# Altium PCB BLE_PCB_Rev1.PcbDoc (part 1 of 2)
Units mm, origin at the board's own origin, x right, y up, seen from the top; angles counter-clockwise.
Board outline 81.41 x 40.9 mm, 2 copper layers (Top Layer, Bottom Layer), stack 1.57 mm thick; 31 components, 55 nets, 156 pads, 14 vias.
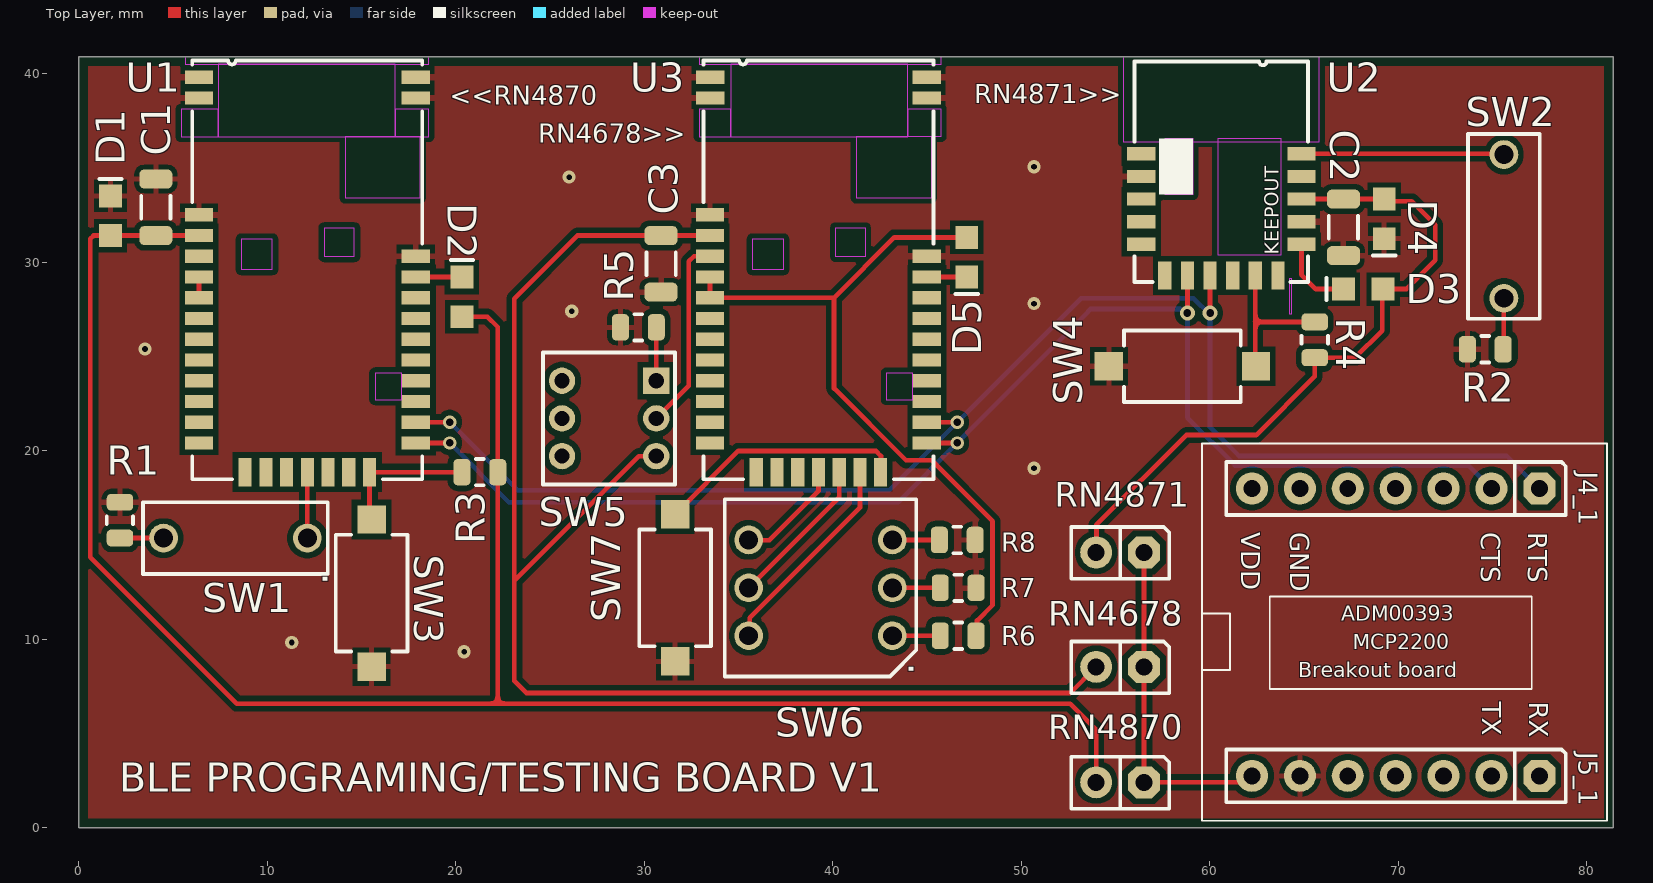
[diagram p0: Top Layer view]
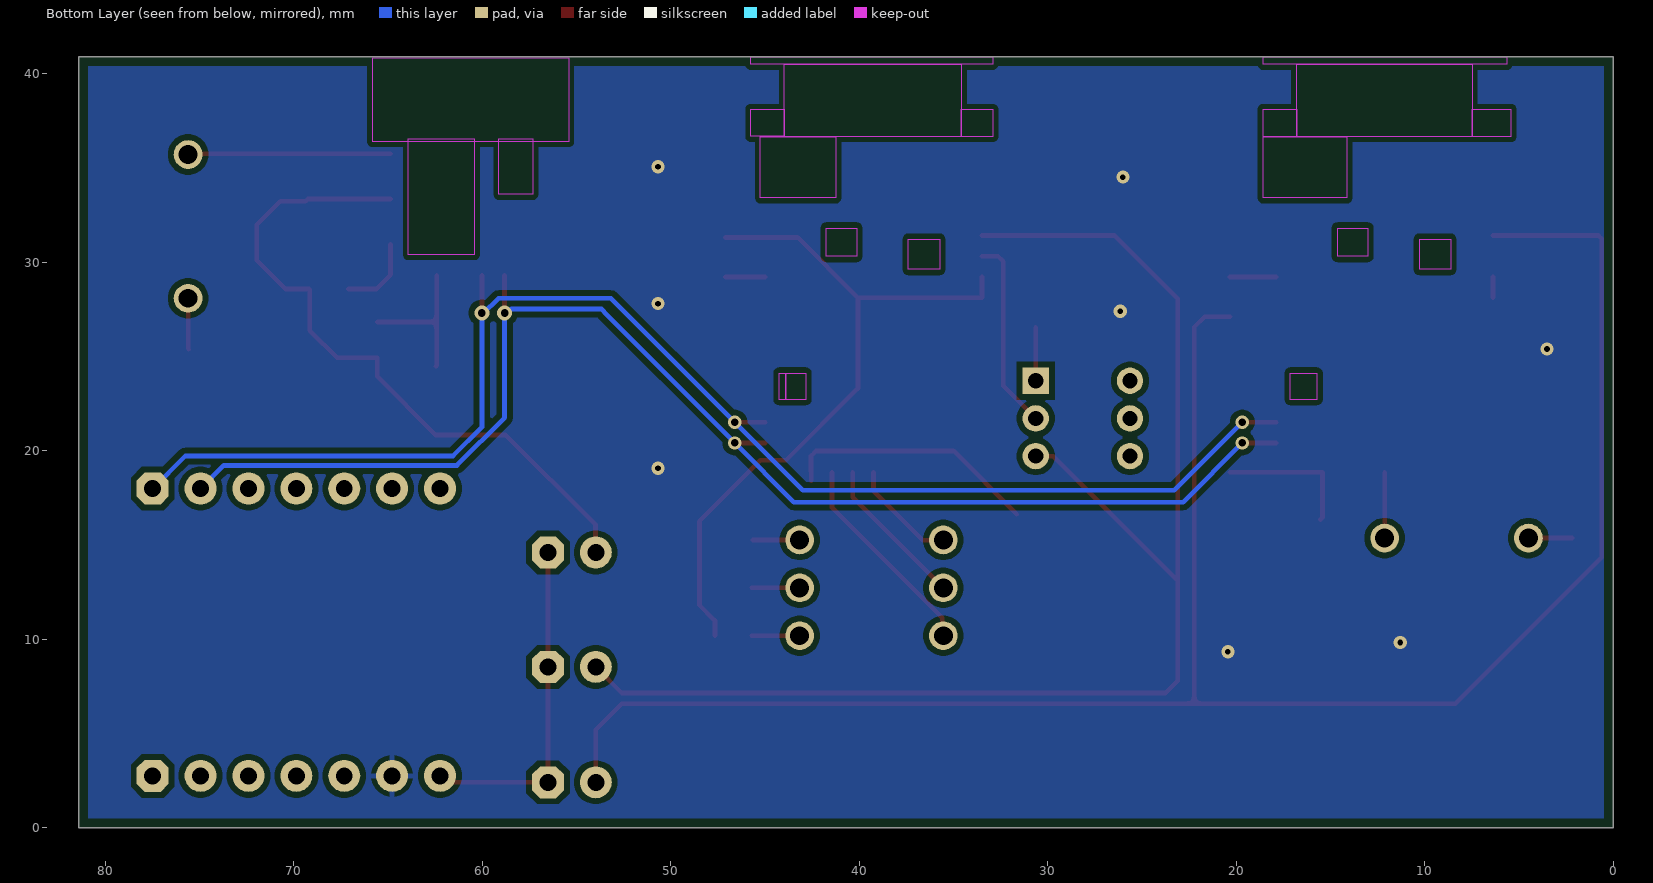
[diagram p1: Bottom Layer view, seen from below]

## Layer stack, top to bottom
Top Solder: solder mask 0.01, Solder Resist, Dk 3.5
Top Layer: signal copper 0.035
Dielectric1: core 1.5, FR-4, Dk 4.8
Bottom Layer: signal copper 0.035
Bottom Solder: solder mask 0.01, Solder Resist, Dk 3.5

## Board outline
0,0 0,40.904 81.407,40.904 81.407,0

## Design rules (kind name [scope] priority, off if disabled: settings)
AcuteAngle [All] p1: minimum=9.00000000000000E+0001 checktracksonly=TRUE
BoardOutlineClearance BoardOutlineClearance_Overlay [OnLayer('Top Overlay','Bottom Overlay')] p1: gap=0.2 ignorepadtopadclearanceinfootprint=FALSE
BoardOutlineClearance [All] p2: gap=0.5 ignorepadtopadclearanceinfootprint=FALSE
Clearance "Net to Polygon 0.5mm" [InNet('your net here') vs (IsRegion)] p1: gap=0.5 ignorepadtopadclearanceinfootprint=FALSE
Clearance "Poly 0.3mm" [(IsRegion)] p2: gap=0.3 ignorepadtopadclearanceinfootprint=FALSE
Clearance [All] p3: gap=0.25 ignorepadtopadclearanceinfootprint=TRUE
ComponentClearance ComponentClearance_ignore [HasFootprint('NET_TIE_0.5mm')] p1: gap=0 collisioncheckmode=3 verticalgap=0 showdistances=FALSE
ComponentClearance [All] p2: gap=0.2 collisioncheckmode=3 verticalgap=0.2 showdistances=FALSE
DiffPairsRouting [All] p1: maxlimit=0.25 minlimit=0.25 mostfreqgap=0.25 toplayer_minwidth=0.25 toplayer_maxwidth=0.25 toplayer_prefwidth=0.25 bottomlayer_minwidth=0.25 bottomlayer_maxwidth=0.25 bottomlayer_prefwidth=0.25 maxuncoupledlength=12.7
FabricationTestPointUsage TestPointUsage [All] p1: valid=0 allowmultiple=FALSE
FabricationTestpoint Testpoint [All] p1: side=3 testpointundercomponent=TRUE minsize=1.016 maxsize=2.54 preferedsize=1.524 minholesize=0 maxholesize=1.016 preferedholesize=0.813 testpointgrid=0.025 allowsidetop=TRUE allowsidebottom=TRUE usegrid=TRUE gridtolerance=0
HoleSize [All] p1: absolutevalues=TRUE maxlimit=6 minlimit=0.25 maxpercent=80.000 minpercent=20.000
HoleToHoleClearance [All] p1: gap=0.3 allowstackedmicrovias=FALSE
MinimumAnnularRing [All] p1: minimumring=0.15
MinimumSolderMaskSliver [All] p1: minsoldermaskwidth=0.15
PasteMaskExpansion PasteMaskExpansion_DNP [IsPad AND HasCompParameterValue('Populated','DNP')] p1: expansion=-5
PasteMaskExpansion [All] p2: expansion=0
PlaneClearance PlaneClearance_pads [IsPad] p1: clearance=0.3
PlaneClearance PlaneClearance_drill [IsObjectKind('Hole')] p2: clearance=0.4
PlaneConnect PlaneConnect_full [IsVia] p1: planeconnectstyle=Direct reliefexpansion=0.5 reliefentries=4 reliefconductorwidth=0.3 reliefairgap=0.3
PlaneConnect [All] p2: planeconnectstyle=Relief reliefexpansion=0.3 reliefentries=4 reliefconductorwidth=0.25 reliefairgap=0.25
PolygonConnect PolygonConnect_0.7 [IsNamedPolygon('0.7mm') vs (InPadClass('All Pads'))] p1: connectstyle=Relief reliefconductorwidth=0.7 reliefentries=4 polygonreliefangle="90 Angle" airgapwidth=0.25
PolygonConnect PolygonConnect_0.5 [IsNamedPolygon('0.5mm') vs (InPadClass('All Pads'))] p2: connectstyle=Relief reliefconductorwidth=0.5 reliefentries=4 polygonreliefangle="90 Angle" airgapwidth=0.25
PolygonConnect PolygonConnect_full [All vs IsVia or IsNamedPolygon('full')] p3: connectstyle=Direct reliefconductorwidth=0 reliefentries=4 polygonreliefangle="90 Angle" airgapwidth=0.254
PolygonConnect [All] p4: connectstyle=Relief reliefconductorwidth=0.3 reliefentries=4 polygonreliefangle="90 Angle" airgapwidth=0.25
RoomDefinition Sheet1 [InComponentClass('Sheet1')] p1: confinementstyle=ConfineIn formatcopy=TRUE lockcomponents=FALSE outline -327.18,-488.376 -276.38,-488.376 -276.38,-462.976 -327.18,-462.976
RoutingCorners [All] p1: cornerstyle=45-Degree minsetback=2.5 maxsetback=2.5
RoutingVias [All] p1: holewidth=0.4 width=0.8 viastyle="Through Hole" minholewidth=0.3 minwidth=0.7 maxholewidth=1.6 maxwidth=2.5
SMDToCorner [All] p1: distance=39370
ShortCircuit [IsNet] p1: allowed=FALSE
SilkToSilkClearance [All] p1: silktosilkclearance=0.15
SilkToSolderMaskClearance SilkscreenOverComponentPads [IsPad] p1: minsilkscreentomaskgap=0.2 clearancetoexposedcopper=TRUE
SolderMaskExpansion SolderMaskExpansion_Component_Via [IsComponentVia] p1: expansion=0.075 istentingtop=FALSE soldermaskfromhole=TRUE
SolderMaskExpansion [All] p2: expansion=0.1 istentingtop=FALSE
UnRoutedNet [All] p1: checkbadconnections=TRUE
ViasUnderSMD [All] p1: allowed=FALSE
Width [All] p1: maxlimit=7 minlimit=0.2 preferedwidth=0.25
15 further rules are at their usual default settings.

## Components (designator, comment, footprint, x,y, rotation, side; value= is the part's Value field where it differs from the comment)
C1 "Capacitor NP" CAP_C_1206 4.097,32.912 r90 top value=10uF
C2 "Capacitor NP" CAP_C_1206 67.089,31.848 r270 top value=10uF
C3 "Capacitor NP" CAP_C_1206 30.894,29.912 r90 top value=10uF
D1 "LED_blue" LED_0805_BLUE 1.692,32.462 r90 top value=BLUE
D2 "LED_blue" LED_0805_BLUE 20.333,28.162 r90 top value=BLUE
D3 "LED_blue" LED_0805_BLUE 68.139,28.575 r180 top value=BLUE
D4 "LED_blue" LED_0805_BLUE 69.248,32.298 r270 top value=BLUE
D5 "LED_blue" LED_0805_BLUE 47.103,30.262 r270 top value=BLUE
J4_1 "Header 1x7" HDR_M_2.54_1x7 69.857,17.995 r180 top locked value="HDR-2.54 Male 1x7"
J5_1 "Header 1x7" HDR_M_2.54_1x7 69.857,2.755 r180 top locked value="HDR-2.54 Male 1x7"
R1 "Resistor" RES_C_0805 2.192,16.317 r270 top value=4.7k
R2 "Resistor" RES_C_0805 74.611,25.382 r0 top value=4.7k
R3 "Resistor" RES_C_0805 21.283,18.862 r0 top value=4.7k
R4 "Resistor" RES_C_0805 65.565,25.882 r90 top value=4.7k
R5 "Resistor" RES_C_0805 29.69,26.543 r0 top value=20k
R6 "Resistor" RES_C_0805 46.653,10.187 r0 top value=10
R7 "Resistor" RES_C_0805 46.653,12.727 r0 top value=4.7k
R8 "Resistor" RES_C_0805 46.603,15.267 r0 top value=4.7k
RN4678 "Header 1x2" HDR_M_2.54_1x2 55.245,8.536 r180 top value="HDR-2.54 Male 1x2" (schematic designator J4)
RN4870 "Header 1x2" HDR_M_2.54_1x2 55.245,2.413 r180 top value="HDR-2.54 Male 1x2" (schematic designator J3)
RN4871 "Header 1x2" HDR_M_2.54_1x2 55.245,14.605 r180 top value="HDR-2.54 Male 1x2" (schematic designator J5)
SW1 "Switch DIP 1 Pos" "SW_TH_2.54MM X 1 418117270901" 8.321,15.367 r90 top value="DIP 1 SPST"
SW2 "Switch DIP 1 Pos" "SW_TH_2.54MM X 1 418117270901" 75.598,31.898 r180 top value="DIP 1 SPST"
SW3 "Switch 2 Pin" "SW_TACT_SMD_CK_RS-282G05A3-SM RT" 15.543,12.446 r270 top value=RS-282G05A-SM_RT
SW4 "Switch 2 Pin" "SW_TACT_SMD_CK_RS-282G05A3-SM RT" 58.547,24.482 r180 top value=RS-282G05A-SM_RT
SW5 "Switch on-off 6 Pin" SW_TACT_TH_PS07-22L-PF 28.14,21.712 r270 top value="TACT DPST"
SW6 "Switch DIP 3 Pos" "SW_TH_2.54MM X 3 Omron" 39.351,12.727 r90 top value=DSS-03-B-PF
SW7 "Switch 2 Pin" "SW_TACT_SMD_CK_RS-282G05A3-SM RT" 31.64,12.727 r270 top value=RS-282G05A-SM_RT
U1 "MODULE BM70BLES1FC2" MOD_BM70BLES1FC2 12.133,29.612 r0 top value=RN4870
U2 "RN4871 MODULE" "RN4871 MODULE-16" 60.612,34.798 r0 top value=RN4871
U3 "MODULE BM78SPPS5xC2" MOD_BM78SPPS5xC2 39.241,29.612 r0 top value=RN4678

## Footprints (in the part's own frame and the unit in brackets; to place one, negate y for a bottom-side part, rotate by r counter-clockwise, add the part's x,y. Pads: shape width x height; smd on the part's side, far side on the other; paste and mask are expansions set on the pad)
CAP_C_1206 [mm] "Chip Capacitor, 2-Leads, Body 3.2x1.6mm, IPC Medium Density"
  rrect50% 1x1.75 smd: 1(-1.5,0) 2(1.5,0)
  silkscreen extent -0.6,-0.77 0.6,0.77, body extent -1.6,-0.8 1.6,0.8, height 1
HDR_M_2.54_1x2 [mm] "Header Male Vertical 4 Way 2.54mm Pitch"
  oct 1.7x1.7 hole 0.9: 1(-1.27,0)
  round 1.7 hole 0.9: 2(1.27,0)
  silkscreen extent -2.6,-1.35 2.6,1.4, body extent -2.54,-1.27 2.54,1.27, height 5.94
HDR_M_2.54_1x7 [mm] "Header Male Vertical 7 Way 2.54mm Pitch"
  oct 1.7x1.7 hole 0.9: 1(-7.62,0)
  round 1.7 hole 0.9: 2(-5.08,0) 3(-2.54,0) 4(0,0) 5(2.54,0) 6(5.08,0) 7(7.62,0)
  silkscreen extent -9.02,-1.4 8.98,1.4, body extent -8.88,-1.27 8.89,1.28, height 5.94
LED_0805_BLUE [mm]
  rect 1.2x1.2 smd: 1(-1.05,0) 2(1.05,0)
  silkscreen extent 1.95,-0.6 1.95,0.6, body extent -1.01,-0.62 1.01,0.63, height 1.1
MOD_BM70BLES1FC2 [mm]
  rect 1.5x0.7 smd: 1(-5.742,10.2) 2(-5.742,9.1) 3(-5.75,2.9) 4(-5.75,1.8) 5(-5.75,0.7) 6(-5.75,-0.4) 7(-5.75,-1.5) 8(-5.75,-2.6) 9(-5.75,-3.7) 10(-5.75,-4.8) 11(-5.75,-5.9) 12(-5.75,-7) 13(-5.75,-8.1) 14(-5.75,-9.2) 22(5.75,-9.2) 23(5.75,-8.1) 24(5.75,-7) 25(5.75,-5.9) 26(5.75,-4.8) 27(5.75,-3.7) 28(5.75,-2.6) 29(5.75,-1.5) 30(5.75,-0.4) 31(5.75,0.7) 32(5.75,9.1) 33(5.75,10.2)
  rect 0.7x1.5 smd: 15(-3.3,-10.75) 16(-2.2,-10.75) 17(-1.1,-10.75) 18(0,-10.75) 19(1.1,-10.75) 20(2.2,-10.75) 21(3.3,-10.75)
  Top Layer keep-out region: 2,3.8 6,3.8 6,7.05 2,7.05
  Top Layer keep-out region: 3.6,-6.9 5,-6.9 5,-5.5 3.6,-5.5
  Top Layer keep-out region: 0.9,0.7 2.5,0.7 2.5,2.2 0.9,2.2
  Top Layer keep-out region: -3.5,0 -1.85,0 -1.85,1.6 -3.5,1.6
  silkscreen extent -6.1,-11.12 6.1,11.08, body extent -6,-11 6,11, height 2.4
MOD_BM78SPPS5xC2 [mm]
  rect 1.5x0.7 smd: 1(-5.742,10.2) 2(-5.742,9.1) 3(-5.75,2.9) 4(-5.75,1.8) 5(-5.75,0.7) 6(-5.75,-0.4) 7(-5.75,-1.5) 8(-5.75,-2.6) 9(-5.75,-3.7) 10(-5.75,-4.8) 11(-5.75,-5.9) 12(-5.75,-7) 13(-5.75,-8.1) 14(-5.75,-9.2) 22(5.75,-9.2) 23(5.75,-8.1) 24(5.75,-7) 25(5.75,-5.9) 26(5.75,-4.8) 27(5.75,-3.7) 28(5.75,-2.6) 29(5.75,-1.5) 30(5.75,-0.4) 31(5.75,0.7) 32(5.75,9.1) 33(5.75,10.2)
  rect 0.7x1.5 smd: 15(-3.3,-10.75) 16(-2.2,-10.75) 17(-1.1,-10.75) 18(0,-10.75) 19(1.1,-10.75) 20(2.2,-10.75) 21(3.3,-10.75)
  Top Layer keep-out region: 2,3.8 6,3.8 6,7.05 2,7.05
  Top Layer keep-out region: 3.6,-6.9 5,-6.9 5,-5.5 3.6,-5.5
  Top Layer keep-out region: 0.9,0.7 2.5,0.7 2.5,2.2 0.9,2.2
  Top Layer keep-out region: -3.5,0 -1.85,0 -1.85,1.6 -3.5,1.6
  silkscreen extent -6.1,-11.12 6.1,11.08, body extent -6,-11 6,11, height 2.4
RES_C_0805 [mm] "Chip Resistor, 2-Leads, Body 2.0x1.3mm, IPC Medium Density"
  rrect50% 0.9x1.4 smd: 1(-0.95,0) 2(0.95,0)
  silkscreen extent -0.2,-0.7 0.2,0.7, body extent -1,-0.63 1,0.63, height 0.78
"RN4871 MODULE-16" [mm]
  rect 1.5x0.7 smd: 1(-4.25,0.95) 2(-4.25,-0.25) 3(-4.25,-1.45) 4(-4.25,-2.65) 5(-4.25,-3.85) 12(4.25,-3.85) 13(4.25,-2.65) 14(4.25,-1.45) 15(4.25,-0.25) 16(4.25,0.95)
  rect 0.7x1.5 smd: 6(-3,-5.5) 7(-1.8,-5.5) 8(-0.6,-5.5) 9(0.6,-5.5) 10(1.8,-5.5) 11(3,-5.5)
  silkscreen extent -4.6,-5.85 4.6,5.85, body extent -4.5,-5.79 4.5,5.75, height 2.4
"SW_TACT_SMD_CK_RS-282G05A3-SM RT" [mm]
  rect 1.5x1.5 smd: 1(-3.9,0) 2(3.9,0)
  silkscreen extent -3.1,-1.9 3.1,1.9, body extent -4,-1.8 4,1.8, height 2.5
SW_TACT_TH_PS07-22L-PF [mm] "Samtec 2mm Pitch Header 2x5 Pos"
  rect 1.4x1.4 hole 0.8: 1(-2,2.5)
  round 1.4 hole 0.8: 2(0,2.5) 3(2,2.5) 4(-2,-2.5) 5(0,-2.5) 6(2,-2.5)
  silkscreen extent -3.5,-3.5 3.5,3.5, body extent -3.2,-3.2 3.2,3.2
"SW_TH_2.54MM X 1 418117270901" [mil]
  round 60 hole 39.37: 1(0,-150.11) 2(0.01,150.12)
  silkscreen extent -75,-193 75,193, body extent -70,-189 70,189, height 248
"SW_TH_2.54MM X 3 Omron" [mil]
  round 60 hole 39.37: 1(-100,-150) 2(0,-150) 3(100,-150) 4(100,150) 5(0,150) 6(-100,150)
  silkscreen extent -185,-200 185,200, body extent -181,-195 181,195, height 280

## Part data
C1 C2 C3: library part CAP0461, Manufacturer 1=Murata, Manufacturer 2="Taiyo Yuden", Manufacturer Part Number 1=GRM31CR60J107ME39L, Manufacturer Part Number 2=JMK316BJ107ML-T, Operating Temperature="-55C to +85C", Package=1206, Supplier Part Number 1=490-4539-1-ND, Temperature Coefficient=X5R, Tolerance=20%, Voltage=6.3V, Category=Capacitor, ComponentLink1Description="SVN Datasheet", ComponentLink1URL=https://chn-vm-apps.microchip.com/mchprepo/parts/Datasheets/L0005E.pdf, ComponentLink2Description="Local Datasheet", ComponentLink2URL=C:\ALTIUM_WORK\00001_MCHP-CDB\Datasheets\L0005E.pdf, ComponentLink3Description="Open Symbol", ComponentLink3URL="C:\ALTIUM_WORK\00001_MCHP-CDB\Library\LibraryRefs\Capacitor NP.SchLib", ComponentLink4Description="Open Footprint", ComponentLink4URL=C:\ALTIUM_WORK\00001_MCHP-CDB\Library\Footprints\CAP_C_1206.PcbLib, ComponentLink5Description="Open Footprint 2", ComponentLink6Description="Open Footprint 3", ComponentLink7Description="Open Footprint 4", Description_="CAP CER 100uF 6.3V 20% X5R SMD 1206", Dev Tools Status=Production, MCHP-ID=CAP0461, Populated=Yes, Quantity Override=1, Revision=1, Status="MCL Design", Supplier 1=Digi-Key, Supplier 2=Digi-Key, Supplier Part Number 2=587-1963-1-ND, Symbol="Capacitor NP", Type=Ceramic
D1 D2 D3 D4 D5: library part DIODE1080, "LED", MCHP-ID=DIODE1080
J4_1: library part CON0448, Manufacturer 1="Wurth Electronics Inc", Manufacturer 2=Samtec, Manufacturer Part Number 1=61300711121, Manufacturer Part Number 2=TSW-107-07-S-S, Manufacturer Part Number 3=TSW-107-07-G-S, Supplier Part Number 1=732-5320-ND, Category=Connector, ComponentLink1Description="SVN Datasheet", ComponentLink1URL=https://chn-vm-apps.microchip.com/mchprepo/parts/Datasheets/TSW-XXX-XX-XXX-X-XX-XXX-MKT.pdf, ComponentLink2Description="Local Datasheet", ComponentLink2URL=C:\ALTIUM_WORK\00001_MCHP-CDB\Datasheets\TSW-XXX-XX-XXX-X-XX-XXX-MKT.pdf, ComponentLink3Description="Open Symbol", ComponentLink3URL="C:\ALTIUM_WORK\00001_MCHP-CDB\Library\LibraryRefs\Header 1x7.SchLib", ComponentLink4Description="Open Footprint", ComponentLink4URL=C:\ALTIUM_WORK\00001_MCHP-CDB\Library\Footprints\HDR_M_2.54_1x7.PcbLib, ComponentLink5Description="Open Footprint 2", ComponentLink6Description="Open Footprint 3", ComponentLink7Description="Open Footprint 4", Description_="CON HDR-2.54 Male 1x7 Gold 5.84MH TH VERT", Dev Tools Status=Production, Manufacturer 3=Samtec, MCHP-ID=CON0448, Populated=Yes, Quantity Override=1, Revision=1, Status="MCL Design", Supplier 1=Digi-Key, Supplier 2=Digi-Key, Supplier 3=Samtec, Supplier Part Number 2=SAM1033-07-ND, Supplier Part Number 3=TSW-107-07-G-S, Symbol="Header 1x7", Type="Header 2.54mm"
J5_1: library part CON0448, Manufacturer 1=Samtec, Manufacturer Part Number 1=TSW-107-07-S-S, Manufacturer Part Number 2=TSW-107-07-G-S, Category=Connector, ComponentLink1Description=Datasheet, ComponentLink1URL=https://chn-vm-apps.microchip.com/mchprepo/parts/Datasheets/TSW-XXX-XX-XXX-X-XX-XXX-MKT.pdf, Description_="CON HDR-2.54 Male 1x7 Gold 5.84MH TH VERT", Manufacturer 2=Samtec, MCHP-ID=CON0448, Populated=Yes, Quantity Override=1, Revision=1, Status=Production, Supplier 1=Samtec, Supplier 2=Samtec, Supplier Part Number 1=TSW-107-07-S-S, Supplier Part Number 2=TSW-107-07-G-S, Type="Header 2.54mm"
R1 R2 R3 R4 R5 R6 R7 R8: library part RES1372, Package=0805, Tolerance=0.1%, MCHP-ID=RES1372
RN4678 RN4870 RN4871: library part CON1312, Manufacturer 1="Sullins Connector Solutions", Manufacturer 2="SHENZHEN JUNHAO ENGINEERING", Manufacturer Part Number 1=PREC002SAAN-RC, Manufacturer Part Number 2=R-211-0211-0021-000, Supplier Part Number 1=S1012EC-02-ND, Category=Connector, ComponentLink1Description="SVN Datasheet", ComponentLink1URL="https://chn-vm-apps.microchip.com/mchprepo/parts/Datasheets/z RzCzzzSzzN-RC, ST,11635-B.pdf", ComponentLink2Description="Local Datasheet", ComponentLink2URL="C:\ALTIUM_WORK\00001_MCHP-CDB\Datasheets\z RzCzzzSzzN-RC, ST,11635-B.pdf", ComponentLink3Description="Open Symbol", ComponentLink3URL="C:\ALTIUM_WORK\00001_MCHP-CDB\Library\LibraryRefs\Header 1x2.SchLib", ComponentLink4Description="Open Footprint", ComponentLink4URL=C:\ALTIUM_WORK\00001_MCHP-CDB\Library\Footprints\HDR_M_2.54_1x2.PcbLib, ComponentLink5Description="Open Footprint 2", ComponentLink6Description="Open Footprint 3", ComponentLink7Description="Open Footprint 4", Description_="CON HDR-2.54 Male 1x2 Tin 5.84MH TH VERT", Dev Tools Status=Production, MCHP-ID=CON1312, Owner="Randolph Sobrepena", Populated=YES, Quantity Override=1, Restricted Sourcing=No, Revision=3, Status="MCL Design", Supplier 1=Digi-Key, Supplier 2="SHENZHEN JUNHAO ENGINEERING", Supplier Part Number 2=R-211-0211-0021-000, Symbol="Header 1x2", Type="Header 2.54mm"
SW1 SW2: library part SWITCH1055, Current=25mA, Manufacturer 1="Würth Elektronik", Manufacturer Part Number 1=418117270901, Operating Temperature="-40°C to 85°C", Supplier Part Number 1=732-3831-5-ND, Voltage=24V, Category=Switch, ComponentLink1Description="SVN Datasheet", ComponentLink1URL=https://chn-vm-apps.microchip.com/mchprepo/parts/Datasheets/4181172709xx.pdf, ComponentLink2Description="Local Datasheet", ComponentLink2URL=C:\ALTIUM_WORK\00001_MCHP-CDB\Datasheets\4181172709xx.pdf, ComponentLink3Description="Open Symbol", ComponentLink3URL="C:\ALTIUM_WORK\00001_MCHP-CDB\Library\LibraryRefs\Switch DIP 1 Pos.SchLib", ComponentLink4Description="Open Footprint", ComponentLink4URL="C:\ALTIUM_WORK\00001_MCHP-CDB\Library\Footprints\SW_TH_2.54MM X 1 418117270901.PcbLib", ComponentLink5Description="Open Footprint 2", ComponentLink6Description="Open Footprint 3", ComponentLink7Description="Open Footprint 4", Description_="SWITCH DIP 1 SPST 24V 25mA 418117270901 TH", Dev Tools Status=Production, MCHP-ID=SWITCH1055, Owner="Gabor Bihari", Populated=YES, Quantity Override=1, Revision=2, Status="MCL Design", Supplier 1=Digi-Key, Symbol="Switch DIP 1 Pos", Type=DIP
SW3 SW4 SW7: library part SWITCH1057, "Switch", Current=50mA, Manufacturer 1=C&K, Manufacturer 2="C&K Components", Manufacturer Part Number 1=KSR211GLFS, Manufacturer Part Number 2="RS-282G05A3-SM RT", Voltage=12V, Category=Switch, ComponentLink1Description="SVN Datasheet", ComponentLink1URL=https://chn-vm-apps.microchip.com/mchprepo/parts/Datasheets/RS-282G05A-SM_RT.pdf, ComponentLink2Description="Local Datasheet", ComponentLink2URL=C:\ALTIUM_WORK\00001_MCHP-CDB\Datasheets\RS-282G05A-SM_RT.pdf, ComponentLink3Description="Open Symbol", ComponentLink3URL="C:\ALTIUM_WORK\00001_MCHP-CDB\Library\LibraryRefs\Switch 2 Pin.SchLib", ComponentLink4Description="Open Footprint", ComponentLink4URL="C:\ALTIUM_WORK\00001_MCHP-CDB\Library\Footprints\SW_TACT_SMD_CK_RS-282G05A3-SM RT.PcbLib", ComponentLink5Description="Open Footprint 2", ComponentLink6Description="Open Footprint 3", ComponentLink7Description="Open Footprint 4", Description_="SWITCH TACT SPST 12V 50mA RS-282G05A3-SM RT", Dev Tools Status=Production, MCHP-ID=SWITCH1057, Owner="Gabor Bihari", Populated=YES, Quantity Override=1, Revision=2, Status="MCL Design", Supplier 1=C&K, Supplier 2=Digi-Key, Supplier Part Number 1=KSR211GLFS, Supplier Part Number 2=CKN10384CT-ND, Symbol="Switch 2 Pin", Type=Tactile
SW5: library part SWITCH1041, "PS-5177", Manufacturer 1=E-Switch, Manufacturer Part Number 1=TL2230OAF140, Category=Switch, ComponentLink1Description="SVN Datasheet", ComponentLink2Description="Local Datasheet", ComponentLink3Description="Open Symbol", ComponentLink3URL="C:\ALTIUM_WORK\00001_MCHP-CDB\Library\LibraryRefs\Switch on-off 6 Pin.SchLib", ComponentLink4Description="Open Footprint", ComponentLink4URL=C:\ALTIUM_WORK\00001_MCHP-CDB\Library\Footprints\SW_TACT_TH_PS07-22L-PF.PcbLib, ComponentLink5Description="Open Footprint 2", ComponentLink6Description="Open Footprint 3", ComponentLink7Description="Open Footprint 4", Description_="SWITCH TACTILE PUSH ON-OFF 6 PIN", Dev Tools Status=Production, MCHP-ID=SWITCH1041, Owner="Duane Burt", Populated=YES, Quantity Override=1, Revision=2, Status="MCL Design", Supplier 1=E-Switch, Supplier Part Number 1=TL2230OAF140, Symbol="Switch on-off 6 Pin", Type=Tactile
SW6: library part SWITCH1042, "Switch DIP", Manufacturer 1=C&K, Manufacturer 2="DIPTRONICS MANUFACTURING INC", Manufacturer 3="ROKI ELECTRONICS CO., LTD.", Manufacturer Part Number 1=BDB03, Manufacturer Part Number 2=NDS-03V, Manufacturer Part Number 3=DSS-03-B-PF, Manufacturer Part Number 4=BD03, Supplier Part Number 1=CKN12078-ND, Category=Switch, ComponentLink1Description="SVN Datasheet", ComponentLink2Description="Local Datasheet", ComponentLink3Description="Open Symbol", ComponentLink3URL="C:\ALTIUM_WORK\00001_MCHP-CDB\Library\LibraryRefs\Switch DIP 3 Pos.SchLib", ComponentLink4Description="Open Footprint", ComponentLink4URL="C:\ALTIUM_WORK\00001_MCHP-CDB\Library\Footprints\SW_TH_2.54MM X 3 Omron.PcbLib", ComponentLink5Description="Open Footprint 2", ComponentLink6Description="Open Footprint 3", ComponentLink7Description="Open Footprint 4", Description_="SWITCH DIP 3 SPST 24VDC 25MA DSS-03-B-PF TH", Dev Tools Status=Production, Manufacturer 4=C&K, MCHP-ID=SWITCH1042, Owner="Duane Burt", Populated=YES, Quantity Override=1, Revision=4, Status="MCL Design", Supplier 1=Digi-Key, Supplier 2=Mouser, Supplier 3="ROKI ELECTRONICS CO., LTD.", Supplier 4=Digi-Key, Supplier Part Number 2=113-NDS03V, Supplier Part Number 3=DSS-03-B-PF, Supplier Part Number 4=CKN3002-ND, Symbol="Switch DIP 3 Pos", Type=DIP
U1: library part MIC6594, Manufacturer 1="Microchip Technology Inc", Manufacturer Part Number 1=RN4870-V/RM118, Operating Temperature="-20C to +70C", Category=MCHP-Wireless, ComponentLink1Description="SVN Datasheet", ComponentLink1URL=https://www.microchip.com/sitesearch/search/Product%20and%20Development%20Tools/RN4870-V/RM118, ComponentLink2Description="Local Datasheet", ComponentLink3Description="Open Symbol", ComponentLink3URL="C:\ALTIUM_WORK\00001_MCHP-CDB\Library\LibraryRefs\MODULE BM70BLES1FC2.SchLib", ComponentLink4Description="Open Footprint", ComponentLink4URL=C:\ALTIUM_WORK\00001_MCHP-CDB\Library\Footprints\MOD_BM70BLES1FC2.PcbLib, ComponentLink5Description="Open Footprint 2", ComponentLink6Description="Open Footprint 3", ComponentLink7Description="Open Footprint 4", Description_="MCHP RF BLUETOOTH RN4870-V/RM118 MODULE-33", Dev Tools Status=Production, MCHP-ID=MIC6594, Owner="Jojie Batislaon", Populated=YES, Quantity Override=1, Revision=1, Status="MCL Design", Supplier 1="Microchip Technology Inc", Supplier Part Number 1=RN4870-V/RM118, Symbol="MODULE BM70BLES1FC2", Type=Bluetooth
U2: library part MIC8998, Manufacturer 1="Microchip Technology", Manufacturer Part Number 1=RN4871-I/RM130, Operating Temperature="-40C to +85C", Supplier Part Number 1=RN4871-I/RM130-ND, Category=MCHP-Wireless, ComponentLink1Description="SVN Datasheet", ComponentLink1URL=https://chn-vm-apps.microchip.com/mchprepo/parts/Datasheets/50002489C.pdf, ComponentLink2Description="Local Datasheet", ComponentLink2URL=C:\ALTIUM_WORK\00001_MCHP-CDB\Datasheets\50002489C.pdf, ComponentLink3Description="Open Symbol", ComponentLink3URL="C:\ALTIUM_WORK\00001_MCHP-CDB\Library\LibraryRefs\RN4871 MODULE.SchLib", ComponentLink4Description="Open Footprint", ComponentLink4URL="C:\ALTIUM_WORK\00001_MCHP-CDB\Library\Footprints\RN4871 MODULE-16.PcbLib", ComponentLink5Description="Open Footprint 2", ComponentLink6Description="Open Footprint 3", ComponentLink7Description="Open Footprint 4", Description_="MCHP RF BLUETOOTH RN4871-I/RM130", Dev Tools Status=Production, MCHP-ID=MIC8998, Owner="Octavian Stroe", Populated=YES, Quantity Override=1, Revision=A, Status="MCL Design", Supplier 1=Digi-Key, Symbol="RN4871 MODULE", Type=Bluetooth
U3: library part MIC6625, Manufacturer 1="Microchip Technology", Manufacturer Part Number 1=RN4678-V/RM122, Category=MCHP-Wireless, ComponentLink1Description="SVN Datasheet", ComponentLink1URL=https://www.microchip.com/sitesearch/search/Product%20and%20Development%20Tools/RN4678-V/RM122, ComponentLink2Description="Local Datasheet", ComponentLink3Description="Open Symbol", ComponentLink3URL="C:\ALTIUM_WORK\00001_MCHP-CDB\Library\LibraryRefs\MODULE BM78SPPS5xC2.SchLib", ComponentLink4Description="Open Footprint", ComponentLink4URL=C:\ALTIUM_WORK\00001_MCHP-CDB\Library\Footprints\MOD_BM78SPPS5xC2.PcbLib, ComponentLink5Description="Open Footprint 2", ComponentLink6Description="Open Footprint 3", ComponentLink7Description="Open Footprint 4", Description_="MCHP RF BLUETOOTH RN4678-V/RM MODULE-33", Dev Tools Status=Production, MCHP-ID=MIC6625, Owner="Jojie Batislaon", Populated=YES, Quantity Override=1, Revision=3, Status="MCL Design", Supplier 1="Microchip Technology", Supplier Part Number 1=RN4678-V/RM122, Symbol="MODULE BM78SPPS5xC2", Type=Bluetooth

## Via types
v1: diameter 0.7, hole 0.3, Top Layer to Bottom Layer, tented both sides, 8 vias
v2: diameter 0.7, hole 0.4, Top Layer to Bottom Layer, tented both sides, 4 vias
v3: diameter 0.8, hole 0.4, Top Layer to Bottom Layer, tented both sides, 2 vias

## Nets (pads, with @x,y where several pads share a name; then routed paths per layer and width w, separated by ;. In a path a pad name is that pad's centre, name@x,y a point inside that pad or via, vN(x,y) a via of type N, cw(c..) or ccw(c..) an arc to the next point about the centre after c; other vN are vias at no path point)
3.3V: J5_1.7 RN4678.1 RN4870.1 RN4871.1 | length 18.1
  Top Layer w0.25: RN4871.1 RN4678.1 RN4870.1 61.503,2.413 61.845,2.755 J5_1.7
3.3V_1: C1.1 D1.1 D2.1 R3.2 RN4870.2 U1.4 | length 104.7
  Top Layer w0.25: U1.4 C1.1 0.795,31.412 0.625,31.242 0.625,14.361 8.401,6.585 22.233,6.585 ; D2.1 21.683,27.112 22.233,26.562 R3.2 22.233,6.585 ; RN4870.2 53.975,5.205 52.594,6.585 22.233,6.585
3.3V_2: C3.2 RN4678.2 SW5.3 U3.4 | length 74
  Top Layer w0.25: SW5.3 29.715,19.712 23.114,13.111 ; U3.4 C3.2 26.459,31.412 23.114,28.067 23.114,13.111 ; RN4678.2 52.585,7.146 23.758,7.146 23.114,7.79 23.114,13.111
3.3V_3: C2.1 D3.1 D4.1 R4.1 RN4871.2 U2.14 | length 36.6
  Top Layer w0.25: RN4871.2 53.988,14.618 53.988,16.063 58.753,20.828 62.455,20.828 65.565,23.939 R4.1 67.698,24.932 69.139,26.373 69.139,28.525 D3.1 70.43,28.575 71.953,30.098 71.953,31.988 70.713,33.228 69.368,33.228 D4.1 C2.1 U2.14
BK: U1.10
BT_WAKE: U3.9
CTS_MCP: J5_1.2
EAN: SW6.6 U3.20 | length 11.1
  Top Layer w0.25: SW6.6 35.593,10.239 35.593,11.138 41.441,16.986 U3.20
GND: C1.2 C2.2 C3.1 D1.2 D4.2 J5_1.6 R1.1 R2.1 R5.1 R7.2 R8.2 SW3.2 SW4.2 SW7.2 U1.1 U1.2 U1.3 U1.31 U1.32 U1.33 U2.2 U2.13 U3.1 U3.2 U3.3 U3.31 U3.32 U3.33
  other v1: 20.447,9.337 11.303,9.827 50.673,19.067 3.52,25.395 26.153,27.397 50.673,27.802 26.017,34.512 50.673,35.059
INT_3V3: D5.1 R6.2 U3.6 U3.7 | length 38.6
  Top Layer w0.25: U3.6 U3.7 40.072,28.112 ; D5.1 43.272,31.312 40.072,28.112 ; R6.2@47.653,10.187 47.653,10.991 48.478,11.816 48.478,16.25 45.241,19.487 43.886,19.487 40.072,23.302 40.072,28.112
LED: D5.2 U3.30 | length 2.1
  Top Layer w0.25: U3.30 D5.2
NetR1_2: R1.2 SW1.2 | length 2.3
  Top Layer w0.25: R1.2 SW1.2
NetR2_2: R2.2 SW2.2 | length 2.7
  Top Layer w0.25: R2.2 75.598,25.419 SW2.2
NetR5_2: R5.2 SW5.1 | length 2.8
  Top Layer w0.25: SW5.1 R5.2
NetR6_1: R6.1 SW6.1 | length 2.5
  Top Layer w0.25: SW6.1 R6.1
NetR7_1: R7.1 SW6.2 | length 2.5
  Top Layer w0.25: SW6.2 R7.1
NetR8_1: R8.1 SW6.3 | length 2.5
  Top Layer w0.25: SW6.3 R8.1
P00: U1.15
P00_1: U2.11
P02: D2.2 U1.30 | length 2.5
  Top Layer w0.25: U1.30 D2.2
P02_1: D3.2 U2.12 | length 4.2
  Top Layer w0.25: U2.12 64.862,29.339 65.627,28.575 D3.2
P2_4: SW6.5 U3.19 | length 8.1
  Top Layer w0.25: SW6.5 40.341,17.527 U3.19
P07: U1.29
P10: U1.16
P11: U1.12
P12: U1.13
P12_1: U2.3
P13: U1.14
P13_1: U2.4
P16_1: U2.6
P17_1: U2.5
P20: SW1.1 U1.18 | length 3.5
  Top Layer w0.25: SW1.1 U1.18
P20_1: SW2.1 U2.16 | length 10.8
  Top Layer w0.25: U2.16 75.561,35.748 SW2.1
P20_2: SW6.4 U3.18 | length 5.9
  Top Layer w0.25: SW6.4 35.662,15.146 35.769,15.253 36.642,15.253 39.241,17.852 U3.18
P22: U1.5
P23: U1.9
P24: U1.19
P27: U1.11
P27_1: U2.15
P31: U1.24
P32: U1.25
P33: U1.26
P34: U1.27
P35: U1.28
P36: U1.17
P36_1: U2.9
RST_N: R3.1 SW3.1 U1.21 | length 7.5
  Top Layer w0.25: SW3.1 15.433,16.456 U1.21 R3.1
RST_N1: R4.2 SW4.1 U2.10 | length 8
  Top Layer w0.25: U2.10 62.412,26.832 ; SW4.1 62.412,24.517 62.412,26.832 ; R4.2 62.412,26.832
RST_N2: SW7.1 U3.21 | length 13.7
  Top Layer w0.25: SW7.1 35,19.987 42.292,19.987 42.559,19.72 42.559,18.879 U3.21 U3.21@42.541,18.412
RTS_MCP: J5_1.1
RX_MCP: J4_1.1 U1.23 U2.8 U3.23 | length 76.6
  Top Layer w0.25: U1.23 v2(19.683,21.512) ; U3.23 v2(46.603,21.512) ; v3(60.012,27.305) U2.8
  Bottom Layer w0.25: v2(19.683,21.512) 23.288,17.907 42.998,17.907 v2(46.603,21.512) 53.171,28.08 59.133,28.08 v3@59.96,27.253 ; v3(60.012,27.305) 60.012,21.257 61.549,19.72 75.752,19.72 J4_1.1
SW_BTN: SW5.2 U3.5 | length 10.3
  Top Layer w0.25: SW5.2 32.366,23.438 32.366,30.037 32.641,30.312 U3.5
TX_MCP: J4_1.2 U1.22 U2.7 U3.22 | length 73.4
  Top Layer w0.25: U1.22 v2(19.683,20.412) ; U3.22 v2(46.603,20.412) ; v3(58.812,27.305) U2.7
  Bottom Layer w0.25: v2(19.683,20.412) 22.823,17.272 43.463,17.272 v2(46.603,20.412) 53.531,27.34 53.531,27.373 53.678,27.52 58.449,27.52 58.663,27.305 v3(58.812,27.305) 58.812,21.75 61.342,19.22 73.712,19.22 J4_1.2
ULPC: U1.8
VDD_IO: U1.6 U1.7 | length 1.1
  Top Layer w0.25: U1.7 U1.6
pads on no net: J4_1.3 J4_1.4 J4_1.5 J4_1.6 J4_1.7 J5_1.3 J5_1.4 J5_1.5 SW5.4 SW5.5 SW5.6 U1.20 U2.1 U3.8 U3.10 U3.11 U3.12 U3.13 U3.14 U3.15 U3.16 U3.17 U3.24 U3.25 U3.26 U3.27 U3.28 U3.29

## Polygon pours and split planes (outlines as drawn)
GND on Top Layer "GND_L01_P000" (solid, pour order 0): 0,41.021 0,0 81.407,0 81.407,41.021
GND on Bottom Layer "GND_L02_P001" (solid, pour order 1): 0,41.021 0,0 81.407,0 81.407,41.021

## Keep-outs
Top Layer:
  rectangle: 64.225,27.253 64.352,29.13
  rectangle: 16.797,36.662 18.575,38.1
  rectangle: 14.133,33.412 18.133,36.662
  rectangle: 14.133,36.662 18.133,36.662
  rectangle: 7.399,36.662 16.797,40.491
  rectangle: 5.644,40.491 18.575,40.891
  rectangle: 5.433,36.662 7.399,38.1
  rectangle: 60.412,30.398 63.787,36.548
  rectangle: 57.612,33.598 59.112,36.548
  rectangle: 55.412,36.398 65.812,40.904
  rectangle: 32.919,36.662 34.577,38.1
  rectangle: 34.577,36.662 43.975,40.491
  rectangle: 43.975,36.675 45.753,38.1
  rectangle: 32.919,40.491 45.753,40.904
Bottom Layer:
  rectangle: 14.133,33.412 18.575,36.662
  rectangle: 8.633,29.612 10.283,31.212
  rectangle: 5.433,36.662 7.493,38.1
  rectangle: 5.644,40.491 18.575,40.891
  rectangle: 16.797,36.662 18.575,38.1
  rectangle: 7.493,36.662 16.797,40.491
  rectangle: 15.733,22.712 17.133,24.112
  rectangle: 13.033,30.312 14.633,31.812
  rectangle: 8.633,29.612 10.283,31.212
  rectangle: 43.886,22.712 44.241,24.112
  rectangle: 57.312,33.598 59.112,36.548
  rectangle: 60.412,30.398 63.912,36.548
  rectangle: 55.412,36.398 65.812,40.848
  rectangle: 42.841,22.712 43.886,24.112
  rectangle: 40.141,30.312 41.741,31.812
  rectangle: 35.741,29.612 37.391,31.212
  rectangle: 41.241,33.412 45.241,36.662
  rectangle: 43.975,36.675 45.753,38.1
  rectangle: 32.919,40.491 45.753,40.894
  rectangle: 32.919,36.662 34.577,38.1
  rectangle: 34.577,36.662 43.975,40.491
Keep-Out Layer:
  text "'.Layer_Name'" at 300.5,-177.546 h1.5

## Other copper
Top Layer:
  text "'.ProjectRevisionART'" at 335.678,-177.368 h1.5
  text "'.Layer_Name'" at 300.5,-177.546 h1.5
Bottom Layer:
  text "04-'.ProjectPCBNumber'-R'.ProjectRevisionART'" at 242,-127.296 h1.2
  text ".ProjectRevisionART" at 335.678,-177.368 h1.5
  text ".ProjectRevisionART" at 335.678,-177.368 h1.5
  text "'.ProjectRevisionART'" at 335.678,-177.368 h1.5
  text "'.Layer_Name'" at 300.5,-177.546 h1.5

## Silkscreen, mask and mechanical layers (free items; w line width, h text height)
Top Overlay:
  region: 289.8,-140.896 289.8,-138.896 291.8,-139.896
  lines w0.1: 59.577,9.375 59.577,8.375 61.077,8.375 61.077,11.375 60.587,11.375 59.577,11.375 ; 59.577,19.375 59.577,1.355 59.577,0.375 81.077,0.375 81.077,17.875 81.077,20.375 59.577,20.375 59.577,19.395 ; 63.177,7.368 77.077,7.368 77.077,12.275 63.177,12.275 63.177,7.368
  text "RN4871>>" at 47.498,38.442 h1.02
  text "<<RN4870" at 19.687,38.354 h1.02
  text "RN4678>>" at 24.384,36.322 h1.02
  text "VDD" at 61.657,15.675 h1 r270
  text "GND" at 64.277,15.675 h1 r270
  text "CTS" at 74.398,15.675 h1 r270
  text "RTS" at 76.902,15.675 h1 r270
  text "ADM00393" at 66.982,10.975 h0.8
  text "MCP2200" at 67.582,9.475 h0.8
  text "Breakout board" at 64.682,7.975 h0.8
  text "TX" at 74.452,6.675 h1 r270
  text "RX" at 76.952,6.675 h1 r270
  text "BLE PROGRAMING/TESTING BOARD V1" at 2.159,1.905 h1.52
  text "C" at 251.245,-130.839 h8
  text "1" at 260.096,-131.445 h5
  text "'.ProjectPartNumber'" at 231.5,-131.796 h1.2
  text "" at 244.245,-132.142 h8
  text "5" at 278.5,-132.99 h8
  text "7" at 288.5,-132.99 h8
  text "0" at 298.5,-132.99 h8
  text "1" at 308.5,-132.99 h8
  text "6" at 268.5,-133.023 h8
  text "2" at 318.5,-133.023 h8
  text "3" at 328.5,-133.023 h8
  text "4" at 338.58,-133.023 h8
  text "ICD" at 284.4,-140.796 h1.52
  text "M" at 262,-147.296 h10
  text "" at 315,-147.755 h10
  text "" at 294,-147.78 h10
  text "" at 305,-147.78 h10
  text "" at 324,-147.78 h10
  text "" at 335,-147.78 h10
  text "" at 346,-147.955 h10
  text "*h" at 227.7,-148.796 h7
  text "" at 286,-150.796 h10
  text "dsPICDEM.net™" at 185.75,-157.546 h3
  text "mTouch®" at 208,-157.546 h3
  text "chipKIT™" at 222.25,-157.546 h3
  text "dsPICDEM™" at 185.5,-163.296 h3
  text "MPLAB®" at 208,-163.796 h3
  text "dsPIC®" at 222.25,-163.796 h3
  text "PICDEM.net™" at 185.5,-169.546 h3
  text "PICkit™" at 208.25,-169.796 h3
  text "PIC®" at 222.25,-169.796 h3
  text "PICDEM™" at 185.5,-176.046 h3
  text "PICtail™" at 208.25,-176.046 h3
  text "'.ProjectRevisionART'" at 335.678,-177.368 h1.5
  text "'.Layer_Name'" at 300.5,-177.546 h1.5
Bottom Overlay:
  text "'.ProjectRevisionART'" at 335.678,-177.368 h1.5
  text "'.Layer_Name'" at 300.5,-177.546 h1.5
Top Paste:
  text "'.ProjectRevisionART'" at 335.678,-177.368 h1.5
  text "'.Layer_Name'" at 300.5,-177.546 h1.5
Bottom Paste:
  text "'.ProjectRevisionART'" at 335.678,-177.368 h1.5
  text "'.Layer_Name'" at 300.5,-177.546 h1.5
Top Solder:
  text "'.ProjectRevisionART'" at 335.678,-177.368 h1.5
  text "'.Layer_Name'" at 300.5,-177.546 h1.5
Bottom Solder:
  text "'.ProjectRevisionART'" at 335.678,-177.368 h1.5
  text "'.Layer_Name'" at 300.5,-177.546 h1.5
NOTES (M1):
  text "ASSEMBLY NOTES:" at 29.4,-127.896 h4
  text "1. ALL COMPONENTS SHALL BE RoHS COMPLIANT." at -4.7,-132.996 h3
  text "2. ALL UNUSED THROUGH HOLE COMPONENT LOCATIONS SHALL BE FREE OF SOLDER." at -4.7,-135.996 h3
  text "3. ALL COMPONENTS SHALL BE MOUNTED FLUSH TO THE BOARD, EXCEPT AS NOTED." at -4.7,-138.996 h3
  text "4. FINISHED BOARD SHALL BE FREE OF ALL RESIDUES." at -4.7,-141.996 h3
  text "5. ALL LEADS SHALL BE TRIMMED TO A MAXIMUM HEIGHT OF 2mm" at -4.7,-144.996 h3
  text "'.Layer_Name'" at 318.5,-177.546 h1.5
BOARD (M2):
  the board outline again, w0.1
  text "'.ProjectRevisionART'" at 335.678,-177.368 h1.5
  text "'.Layer_Name'" at 300.5,-177.546 h1.5
REF POINTS (M3):
  text "'.Layer_Name'" at 300.5,-177.546 h1.5
FAB (M4):
  drawing of 284 lines, arcs and shapes, not listed
  text "THIS PCB TO BE MANUFACTURED TO MEET ALL ACCEPTANCE LEVELS" at 236.989,32.866 h1.78
  text "OF A CLASS 2 PCB PER ANSI/IPC-A-600G." at 236.989,29.056 h1.78
  text "MATERIAL:" at 236.989,24.436 h1.78
  text "FR-4 or Equivalent" at 257.309,24.436 h1.78
  text "CONTROLLED IMPEDANCE" at 313.5,20.204 h1.78
  text "MULTILAYER" at 263.024,20.086 h1.78
  text "2" at 286.519,20.086 h1.78
  text "LAYERS" at 290.964,20.086 h1.78
  text "Cu WEIGHT EXTERNAL LAYERS" at 257.309,15.236 h1.78
  text "35um" at 309.379,15.236 h1.78
  text "FINISHED" at 318.904,15.236 h1.78
  text "Cu WEIGHT INTERNAL LAYERS" at 257.309,10.386 h1.78
  text "N/A" at 309.379,10.386 h1.78
  text "FINISHED" at 318.904,10.386 h1.78
  text "FINISHED OVERALL THICKNESS" at 257.309,5.536 h1.78
  text "1.6" at 310.649,5.536 h1.78
  text "mm" at 318.904,5.536 h1.78
  text "10" at 333.509,5.536 h1.78
  text "%" at 341.764,5.536 h1.78
  text "COPPER THIEVING ALLOWED" at 257.5,0.704 h1.78
  text "YES" at 314.5,0.704 h1.78
  text "NO" at 331.5,0.704 h1.78
  text "X" at 326.091,0.204 h2.6
  text "FINISH:" at 237,-3.796 h1.78
  text "LEAD-FREE HOT AIR LEVELING" at 263,-4.096 h1.78
  text "X" at 258.4,-4.796 h2.6
  text "IMMERSION GOLD" at 263.024,-9.634 h1.78
  text "IMMERSION TIN" at 263.024,-15.134 h1.78
  text "SMOBC WITH SELECTIVE GOLD PLATING ON LANDS" at 263.024,-18.839 h1.78
  text "INDICATED. 1um GOLD OVER 5-10 um NICKEL" at 263.024,-22.649 h1.78
  text "SOLDERMASK" at 257.309,-27.984 h1.78
  text "DYNACHEM EPIC 200 LPI OR EQUIVALENT" at 278.899,-27.984 h1.78
  text "SOLDERMASK COLOR" at 257.309,-34.334 h1.78
  text "GREEN HIGH GLOSS" at 289.059,-34.334 h1.78
  text "SILKSCREEN COLOR" at 257.309,-40.684 h1.78
  text "WHITE" at 289.059,-40.684 h1.78
  text "Blind / Burried Vias" at 263.5,-46.796 h1.78
  text "DRILLING:" at 237.5,-47.046 h1.78
  text "Via Layer Pairs" at 258,-51.546 h1.78
  text "Top-Bottom" at 278.75,-51.546 h1.78
  text "ALL HOLES TO BE LOCATED BY THE COORDINATES FROM THE NC DRILL DATA PROVIDED." at 236.989,-56.796 h1.78
  text "05-'.ProjectPCBNumber'" at 269,-63.296 h1.78
  text "PCB REV" at 305,-63.296 h1.78
  text "USE ARTWORK SET NO." at 236.989,-63.384 h1.78
  text "'.ProjectRevisionART'" at 318.15,-63.546 h1.78
  text "ALL UL LOGO, MANUFACTURER'S ID, AND DATE CODES SHALL BE PLACED" at 236.989,-69.734 h1.78
  text "ON THE BOTTOM SIDE UNLESS OTHERWISE INDICATED." at 236.989,-73.544 h1.78
  text "ANY ALTERNATIVES TO THE ABOVE SPECIFICATIONS MUST FIRST BE APPROVED." at 236.5,-78.796 h1.78
  text "Layer" at 224.029,-85.471 h1.52
  text "Name" at 234.441,-85.471 h1.52
  text "Material" at 258.056,-85.471 h1.52
  text "Thickness" at 279.894,-85.471 h1.52
  text "Constant" at 296.4,-85.471 h1.52
  text "Gerber" at 310.875,-85.471 h1.52
  text "Board Layer Stack" at 322.81,-85.471 h1.52
  text "Top Overlay" at 234.441,-88.519 h1.52
  text "GTO" at 310.875,-88.519 h1.52
  text "Top Solder" at 234.441,-91.567 h1.52
  text "Solder Resist" at 258.056,-91.567 h1.52
  text "0.010mm" at 279.894,-91.567 h1.52
  text "3.5" at 296.4,-91.567 h1.52
  text "GTS" at 310.875,-91.567 h1.52
  text "1" at 224.029,-94.615 h1.52
  text "Top Layer" at 234.441,-94.615 h1.52
  text "0.035mm" at 279.894,-94.615 h1.52
  text "GTL" at 310.875,-94.615 h1.52
  text "Dielectric1" at 234.441,-97.663 h1.52
  text "FR-4" at 258.056,-97.663 h1.52
  text "1.500mm" at 279.894,-97.663 h1.52
  text "4.8" at 296.4,-97.663 h1.52
  text "2" at 224.029,-100.711 h1.52
  text "Bottom Layer" at 234.441,-100.711 h1.52
  text "0.035mm" at 279.894,-100.711 h1.52
  text "GBL" at 310.875,-100.711 h1.52
  text "Bottom Solder" at 234.441,-103.759 h1.52
  text "Solder Resist" at 258.056,-103.759 h1.52
  text "0.010mm" at 279.894,-103.759 h1.52
  text "3.5" at 296.4,-103.759 h1.52
  text "GBS" at 310.875,-103.759 h1.52
  text "Bottom Overlay" at 234.441,-106.807 h1.52
  text "GBO" at 310.875,-106.807 h1.52
  text "Total board thickness:" at 224.029,-109.855 h1.52
  text "1.590mm" at 279.894,-109.855 h1.52
  text "'.ProjectRevisionFAB'" at 335.678,-177.368 h1.5
  text "'.Layer_Name'" at 300.5,-177.546 h1.5
Case (M5):
  text "'.Layer_Name'" at 300.5,-177.546 h1.5
Cover (M6):
  text "'.Layer_Name'" at 300.5,-177.546 h1.5
Terminal Block (M7):
  text "'.Layer_Name'" at 300.5,-177.546 h1.5
Route Tool Path:
  text "'.Layer_Name'" at 300.5,-177.546 h1.5
V-Cut (M9):
  text "'.Layer_Name'" at 300.5,-177.546 h1.5
Bottom Assembly:
  text "'.VariantName'" at 50.07,-161.546 h0.9
  text "ASSEMBLY VARIANT:" at 64.32,-161.546 h0.9
  text "DOCUMENT NUMBER:" at 18.05,-169.796 h1.14
  text "02-'.ProjectPCBAssyNumber'-D" at 17.8,-172.796 h1.6
  text "'.ProjectRevisionASSY'" at 1.122,-177.368 h1.5
  text "'.Layer_Name'" at 36,-177.546 h1
Top Assembly:
  text "6. PLACE LABEL  ON THE LOCATION INDICATED." at -4.7,-147.996 h3
  text "7." at -4.7,-150.996 h3
  text "ASSEMBLY VARIANT:" at 272.5,-161.546 h0.9
  text "'.VariantName'" at 286.75,-161.546 h0.9
  text "DOCUMENT NUMBER:" at 318.75,-169.796 h1.15
  text "02-'.ProjectPCBAssyNumber'-D" at 319,-172.796 h1.6
  text "'.ProjectRevisionASSY'" at 335.678,-177.368 h1.5
  text "'.Layer_Name'" at 300.5,-177.546 h1
Bottom 3D Body:
  text "'.Layer_Name'" at 300.5,-177.546 h1.15
Top 3D Body:
  text "'.Layer_Name'" at 300.5,-177.546 h1.2
Bottom Courtyard:
  text ".ProjectRevisionART" at 335.678,-177.368 h1.5
  text "'.Layer_Name'" at 300.5,-177.546 h1
Top Courtyard:
  text "'.ProjectRevisionART'" at 335.678,-177.368 h1.5
  text "'.Layer_Name'" at 300.5,-177.546 h1.1
TITLE (M16):
  lines w0.1: 272,-160.296 353.82,-160.296 ; 324,-152.796 324,-155.796 353.82,-155.796 ; 342.54,-177.431 342.54,-176.161 ; 342.54,-176.796 352.7,-176.796 ; 342.7,-175.596 342.7,-174.596 ; 342.7,-175.096 352.7,-175.096 ; 345.08,-177.431 345.08,-176.161 ; 347.62,-177.431 347.62,-176.161 ; 347.7,-175.396 347.7,-174.796 ; 350.16,-177.431 350.16,-176.161 ; 352.7,-177.431 352.7,-176.161 ; 352.7,-175.596 352.7,-174.596 ; 353.82,-155.796 353.82,-155.796
  lines w0.127: -22.1,-122.971 -17.02,-122.971 ; -22.1,-62.646 -17.02,-62.646 ; -22.1,-2.321 -17.02,-2.321 ; 41.4,-183.296 41.4,-178.216 ; 41.4,52.924 41.4,58.004 ; 104.9,-183.296 104.9,-178.216 ; 104.9,52.924 104.9,58.004 ; 168.4,-183.296 168.4,-178.216 ; 168.4,52.924 168.4,58.004 ; 203.96,-178.216 239.52,-178.216 ; 231.9,-183.296 231.9,-178.216 ; 231.9,52.924 231.9,58.004 ; 272,-178.216 272,-152.796 ; 272,-173.796 353.82,-173.796 ; 272,-167.796 353.82,-167.796 ; 272,-161.796 353.82,-161.796 ; 295.4,-183.296 295.4,-178.216 ; 295.4,52.924 295.4,58.004 ; 300,-178.216 300,-161.796 ; 318,-173.796 318,-167.796 ; 331,-178.216 331,-173.796 ; 338.5,-178.216 338.5,-167.796 ; 353.82,-147.736 353.82,-178.216 ; 353.82,-122.971 358.9,-122.971 ; 353.82,-62.646 358.9,-62.646 ; 353.82,-2.321 358.9,-2.321 ; 353.82,-178.216 353.82,-152.796 238,-152.796 238,-178.216 353.82,-178.216 ; 353.82,-178.216 -17.02,-178.216 -17.02,52.924 353.82,52.924 353.82,-178.216 ; -22.1,-183.296 358.9,-183.296 358.9,58.004 -22.1,58.004 -22.1,-183.296
  lines w0.254: 243.32,43.924 243.32,48.424 243.32,52.924 ; 255.82,43.924 255.82,48.424 255.82,52.924 ; 334.32,43.924 334.32,48.424 334.32,52.924 ; 353.82,48.424 232.32,48.424 ; 232.32,48.424 232.32,52.924 353.82,52.924 353.82,43.924 232.32,43.924 232.32,48.424
  text "1" at 9.176,54.702 h1.78
  text "2" at 72.566,54.702 h1.78
  text "3" at 135.795,54.702 h1.78
  text "4" at 199.464,54.702 h1.78
  text "5" at 262.939,54.702 h1.78
  text "6" at 326.566,54.702 h1.78
  text "REV" at 234.82,49.924 h1.52
  text "ECO" at 244.82,49.924 h1.52
  text "Comments" at 291.32,49.424 h1.52
  text "Date" at 339.32,49.424 h1.52
  text "A" at -20.195,25.67 h1.78
  text "A" at 355.725,25.67 h1.78
  text "B" at -20.195,-34.782 h1.78
  text "B" at 355.725,-34.782 h1.78
  text "C" at -20.195,-95.107 h1.78
  text "C" at 355.725,-95.107 h1.78
  text "PART NUMBER:" at 325,-154.796 h1
  text "'.ProjectpartNumber'" at 337,-155.046 h1.5
  text "D" at -20.195,-155.305 h1.78
  text "TITLE:" at 273,-155.296 h1.14
  text "D" at 355.725,-155.305 h1.78
  text "'.ProjectTitle'" at 273,-159.296 h2.5
  text "PCB Layout Contact:" at 273,-163.796 h1.15
  text "GERBER FILE:" at 301,-163.796 h1.15
  text "'.ProjectDrawnBy'" at 273,-166.796 h1.6
  text "'.Plot_File_Name'" at 301,-166.796 h1.5
  text "M" at 241,-168.796 h15.24
  text "Project Owner:" at 273,-169.796 h1.15
  text "BOARD NUMBER:" at 301,-169.796 h1.15
  text "DATE:" at 339.7,-169.796 h1.14
  text "Microchip Technology Inc." at 239.77,-172.056 h1.78
  text "'.ProjectEngineer'" at 273,-172.796 h1.6
  text "04-'.ProjectPCBNumber'" at 301,-172.796 h1.6
  text "'.PRINT_DATE'" at 339.7,-172.796 h1.5
  text "2355 W. Chandler Blvd." at 241,-174.796 h1.78
  text "LAYER NAME:" at 301,-175.296 h1.14
  text "10mm" at 339,-175.396 h0.7
  text "PCB FILE NAME:" at 273,-175.546 h1.15
  text "REV:" at 331.75,-175.546 h1.14
  text "400mil" at 338.9,-177.096 h0.7
  text "Chandler, AZ  85224" at 242,-177.296 h1.78
  text "'.PCB_FILE_NAME_NO_PATH'" at 273,-177.546 h1
  text "1" at 9.176,-181.518 h1.78
  text "2" at 72.566,-181.518 h1.78
  text "3" at 135.795,-181.518 h1.78
  text "4" at 199.464,-181.518 h1.78
  text "5" at 262.939,-181.518 h1.78
  text "6" at 326.566,-181.518 h1.78
Drill Drawing:
  lines w0.25: -6.181,-102.225 -4.514,-102.225 -4.514,-100.558 -6.181,-100.558 -6.181,-102.225 ; -6.181,-96.808 -4.514,-96.808 -5.348,-98.475 -6.181,-96.808 ; -6.181,-94.308 -5.764,-94.308 -5.764,-94.725 -4.931,-94.725 -4.931,-94.308 -4.514,-94.308 -4.514,-93.475 -4.931,-93.475 -4.931,-93.058 -5.764,-93.058 -5.764,-93.475 -6.181,-93.475 -6.181,-94.308 ; -6.181,-90.558 -5.764,-90.558 -5.348,-90.975 -4.931,-90.558 -4.514,-90.558 -4.931,-90.141 -4.514,-89.725 -4.931,-89.725 -5.348,-89.308 -5.764,-89.725 -6.181,-89.725 -5.764,-90.141 -6.181,-90.558 ; -6.181,-87.225 -5.348,-86.808 -4.514,-87.225 -4.931,-86.391 -4.514,-85.558 -5.348,-85.975 -6.181,-85.558 -5.764,-86.391 -6.181,-87.225
  lines w0.3: -7.676,-103.35 197.117,-103.35 ; -7.676,-84.6 197.117,-84.6 ; 6.096,-107.1 6.096,-80.85 ; 23.541,-107.1 23.541,-80.85 ; 57.182,-107.1 57.182,-80.85 ; 69.828,-107.1 69.828,-80.85 ; 107.317,-107.1 107.317,-80.85 ; 122.063,-107.1 122.063,-80.85 ; 140.408,-107.1 140.408,-80.85 ; 162.052,-107.1 162.052,-80.85 ; -7.676,-107.1 197.117,-107.1 197.117,-80.85 -7.676,-80.85 -7.676,-107.1
  text "Symbol" at -5.426,-83.475 h1.8
  text "Hit Count" at 7.221,-83.475 h1.8
  text "Finished Hole Size" at 24.666,-83.475 h1.8
  text "Plated" at 58.307,-83.475 h1.8
  text "Drill Layer Pair" at 70.953,-83.475 h1.8
  text "Via/Pad" at 108.442,-83.475 h1.8
  text "Hole Type" at 123.188,-83.475 h1.8
  text "Hole Length" at 141.533,-83.475 h1.8
  text "Routed Path Length" at 163.177,-83.475 h1.8
  text "6" at 7.221,-87.225 h1.5
  text "0.400mm (15.75mil)" at 24.666,-87.225 h1.5
  text "PTH" at 58.307,-87.225 h1.5
  text "Top Layer - Bottom Layer" at 70.953,-87.225 h1.5
  text "Via" at 108.442,-87.225 h1.5
  text "Round" at 123.188,-87.225 h1.5
  text "-" at 141.533,-87.225 h1.5
  text "-" at 163.177,-87.225 h1.5
  text "6" at 7.221,-90.975 h1.5
  text "0.800mm (31.50mil)" at 24.666,-90.975 h1.5
  text "PTH" at 58.307,-90.975 h1.5
  text "Top Layer - Bottom Layer" at 70.953,-90.975 h1.5
  text "Pad" at 108.442,-90.975 h1.5
  text "Round" at 123.188,-90.975 h1.5
  text "-" at 141.533,-90.975 h1.5
  text "-" at 163.177,-90.975 h1.5
  text "8" at 7.221,-94.725 h1.5
  text "0.300mm (11.81mil)" at 24.666,-94.725 h1.5
  text "PTH" at 58.307,-94.725 h1.5
  text "Top Layer - Bottom Layer" at 70.953,-94.725 h1.5
  text "Via" at 108.442,-94.725 h1.5
  text "Round" at 123.188,-94.725 h1.5
  text "-" at 141.533,-94.725 h1.5
  text "-" at 163.177,-94.725 h1.5
  text "10" at 7.221,-98.475 h1.5
  text "1.000mm (39.37mil)" at 24.666,-98.475 h1.5
  text "PTH" at 58.307,-98.475 h1.5
  text "Top Layer - Bottom Layer" at 70.953,-98.475 h1.5
  text "Pad" at 108.442,-98.475 h1.5
  text "Round" at 123.188,-98.475 h1.5
  text "-" at 141.533,-98.475 h1.5
  text "-" at 163.177,-98.475 h1.5
  text "20" at 7.221,-102.225 h1.5
  text "0.900mm (35.43mil)" at 24.666,-102.225 h1.5
  text "PTH" at 58.307,-102.225 h1.5
  text "Top Layer - Bottom Layer" at 70.953,-102.225 h1.5
  text "Pad" at 108.442,-102.225 h1.5
  text "Round" at 123.188,-102.225 h1.5
  text "-" at 141.533,-102.225 h1.5
  text "-" at 163.177,-102.225 h1.5
  text "50 Total" at 7.221,-105.975 h1.5
  text "DOCUMENT NUMBER:" at 318.75,-169.796 h1.15
  text "04-'.ProjectPCBNumber'-D" at 319,-172.796 h1.6
  text "'.ProjectRevisionFAB'" at 335.678,-177.368 h1.5
TITLE MIRROR (M17):
  lines w0.1: -15.9,-177.431 -15.9,-176.161 ; -15.9,-176.796 -5.74,-176.796 ; -15.9,-175.596 -15.9,-174.596 ; -15.9,-175.096 -5.9,-175.096 ; -13.36,-177.431 -13.36,-176.161 ; -10.9,-175.396 -10.9,-174.796 ; -10.82,-177.431 -10.82,-176.161 ; -8.28,-177.431 -8.28,-176.161 ; -5.9,-175.596 -5.9,-174.596 ; -5.74,-177.431 -5.74,-176.161
  lines w0.127: -22.1,-122.971 -17.02,-122.971 ; -22.1,-62.646 -17.02,-62.646 ; -22.1,-2.321 -17.02,-2.321 ; -17.02,-173.796 64.8,-173.796 ; -17.02,-167.796 64.8,-167.796 ; -17,-161.796 64.82,-161.796 ; -17,-160.296 64.82,-160.296 ; -17,-155.796 -16.383,-155.796 ; -1.7,-178.216 -1.7,-167.796 ; 5.8,-178.216 5.8,-173.796 ; 12.82,-152.796 12.82,-155.796 -16.383,-155.796 ; 18.8,-173.796 18.8,-167.796 ; 36.82,-178.216 36.82,-161.796 ; 41.4,-183.296 41.4,-178.216 ; 41.4,52.924 41.4,58.004 ; 64.82,-178.216 64.82,-152.796 ; 104.9,-183.296 104.9,-178.216 ; 104.9,52.924 104.9,58.004 ; 168.4,-183.296 168.4,-178.216 ; 168.4,52.924 168.4,58.004 ; 231.9,-183.296 231.9,-178.216 ; 231.9,52.924 231.9,58.004 ; 295.4,-183.296 295.4,-178.216 ; 295.4,52.924 295.4,58.004 ; 353.82,-122.971 358.9,-122.971 ; 353.82,-62.646 358.9,-62.646 ; 353.82,-2.321 358.9,-2.321 ; -17.02,-178.216 98.82,-178.216 98.82,-152.796 -17.02,-152.796 -17.02,-178.216 ; -17.02,-178.216 -17.02,52.924 353.82,52.924 353.82,-178.216 -17.02,-178.216 ; -16.383,-155.796 -16.383,-155.796 ; -22.1,-183.296 -22.1,58.004 358.9,58.004 358.9,-183.296 -22.1,-183.296
  text "6" at 10.234,54.702 h1.78
  text "5" at 73.861,54.702 h1.78
  text "4" at 137.336,54.702 h1.78
  text "3" at 201.005,54.702 h1.78
  text "2" at 264.234,54.702 h1.78
  text "1" at 327.624,54.702 h1.78
  text "A" at -18.925,25.67 h1.78
  text "A" at 356.995,25.67 h1.78
  text "B" at -18.925,-34.782 h1.78
  text "B" at 356.995,-34.782 h1.78
  text "C" at -18.925,-95.107 h1.78
  text "C" at 356.995,-95.107 h1.78
  text "PART NUMBER:" at 11.82,-154.796 h1
  text "TITLE:" at 63.82,-154.796 h1.14
  text "'.ProjectpartNumber'" at -0.18,-155.046 h1.5
  text "D" at -18.925,-155.305 h1.78
  text "D" at 356.995,-155.305 h1.78
  text "'.ProjectTitle'" at 63.82,-159.296 h2.5
  text "GERBER FILE:" at 35.82,-163.796 h1.14
  text "PCB DESIGNER:" at 63.82,-163.796 h1.14
  text "'.Plot_File_Name'" at 35.82,-166.796 h1.5
  text "'.ProjectDrawnBy'" at 63.82,-166.796 h1.78
  text "M" at 95.82,-168.796 h15.24
  text "DATE:" at -2.9,-169.796 h1.14
  text "BOARD NUMBER:" at 35.8,-169.796 h1.14
  text "ENGINEER:" at 63.8,-169.796 h1.14
  text "Microchip Technology Inc." at 97.05,-172.056 h1.78
  text "'.PRINT_DATE'" at -2.9,-172.796 h1.5
  text "04-'.ProjectPCBNumber'" at 35.8,-172.796 h1.6
  text "'.ProjectEngineer'" at 63.8,-172.796 h1.78
  text "2355 W. Chandler Blvd." at 95.82,-174.796 h1.78
  text "LAYER NAME:" at 35.8,-175.296 h1.14